# EAGLE board 2-28-13 x1_1 (EAGLE 6.3), part 1 of 2
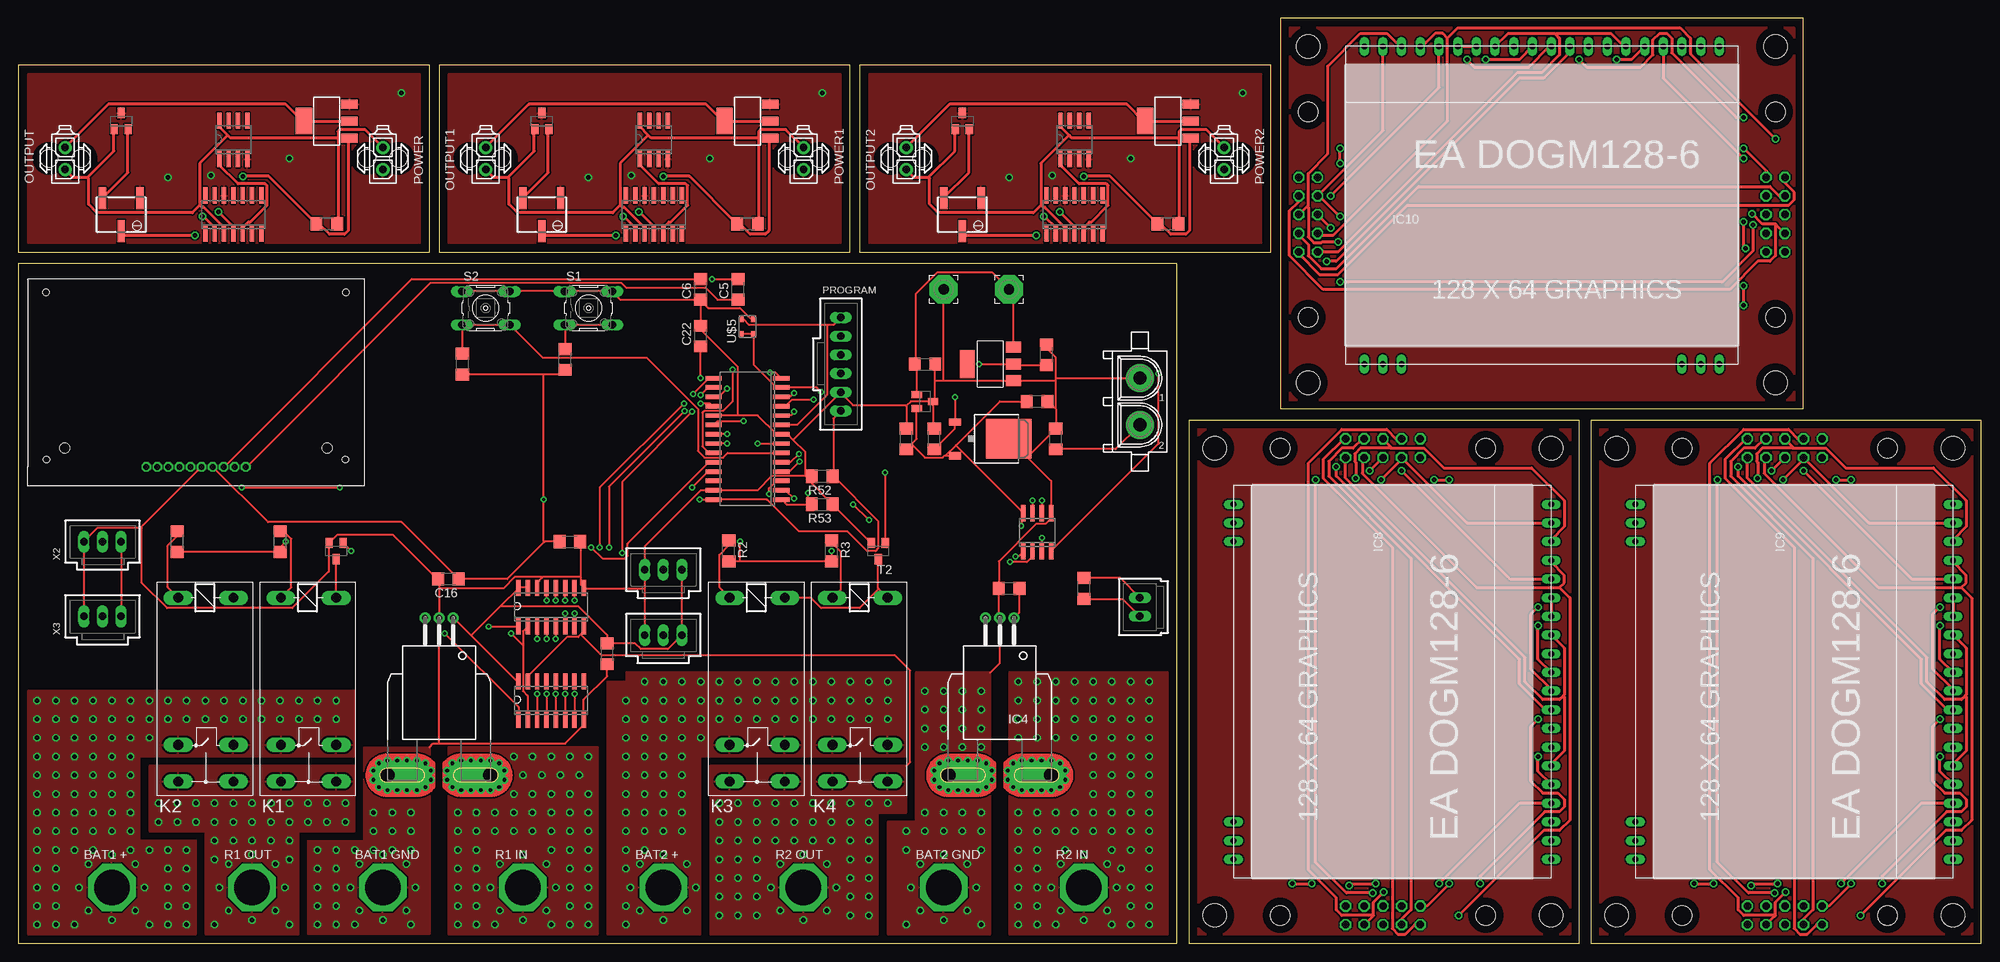
[diagram p0: board, top side]
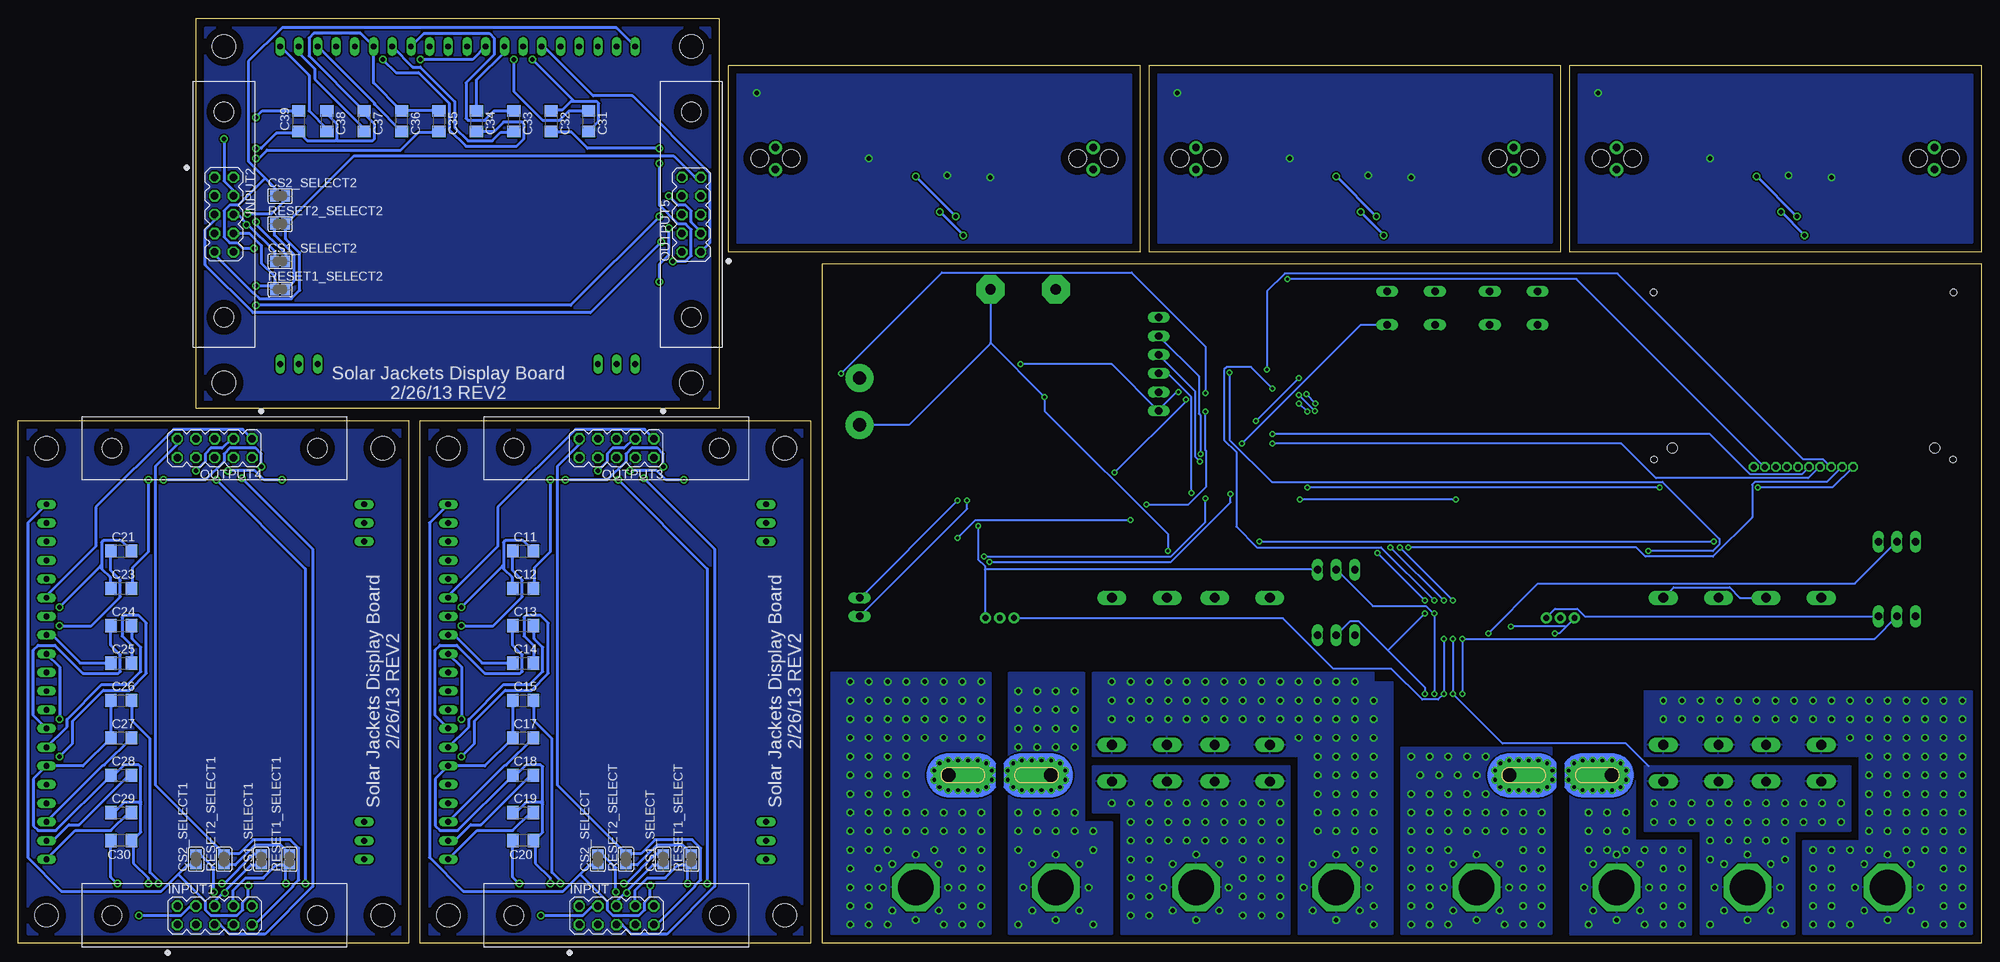
[diagram p1: board, bottom side, seen from below]

Size 266.7 x 125.73 mm. Coordinates in mm from the lower left corner, seen from the top.
Outline: 0,0 157.46,0 157.46,92.38 0,92.38 0,0
Outline: 0,93.98 55.88,93.98 55.88,119.38 0,119.38 0,93.98
Outline: 57.15,93.98 113.03,93.98 113.03,119.38 57.15,119.38 57.15,93.98
Outline: 114.3,93.98 170.18,93.98 170.18,119.38 114.3,119.38 114.3,93.98
Outline: 212.09,0 212.09,71.1 159.08,71.1 159.08,0 212.09,0
Outline: 266.7,0 266.7,71.1 213.69,71.1 213.69,0 266.7,0
Outline: 242.57,125.73 171.47,125.73 171.47,72.72 242.57,72.72 242.57,125.73
Copper layers (1*16): Top 0.035mm / dielectric 1.5mm / Bottom 0.035mm
Design rules "default": minimum track width 10mil, minimum drill 24mil, track to track 8mil, track to pad 8mil, pad to pad 8mil, via to via 8mil, smd to smd 8mil, copper to edge 40mil, drill to drill 8mil, minimum pad ring 10mil, minimum via ring 8mil, stop-mask expansion 4mil, vias tented up to drill 0mil, thermal gap 10mil
Holes 3.17 mm at 208.28,3.81 208.28,67.31 162.56,67.31 162.56,3.81 262.89,3.81 262.89,67.31 217.17,67.31 217.17,3.81 238.76,121.92 175.26,121.92 175.26,76.2 238.76,76.2
vRestrict: area 167.6,8.9 to 205.7,62.2; area 222.2,8.9 to 260.4,62.2; area 180.3,81.3 to 233.7,119.4

## Footprints (pad centres in the part's own frame; a part is rotated, then mirrored left to right if it is on the bottom)
SOLDERPAD = drill 4.826 pad 6.452 octagon: P$1 0,0
C1206 = smd 1.6 x 1.8: 1 -1.4,0; 2 1.4,0
SJ = smd 1.168 x 1.6: 1 -0.762,0; 2 0.762,0
TO252 = smd 1 x 1.6: 1 -2.28,-4.8; 2 2.28,-4.8 | smd 5.4 x 6.2: 3 0,2.5
CB-PFF = drill 0.8 pad 1.5: 1 -1.91,-21.4; 2 0,-21.4; 3 1.91,-21.4 | drill 2 pad 4 offset: IP+ 7,0; IP- -7,0 | drill 0.5 pad 0.9: IP+@2 8.89,0.635; IP+@3 8.89,-0.635; IP+@4 8.175,-1.625; IP+@5 7,-2; IP+@6 5.675,-2; IP+@7 4.35,-2; IP+@8 3,-2; IP+@9 1.825,-1.625; IP+@10 1.1,-0.625; IP+@11 1.1,0.625; IP+@12 1.825,1.625; IP+@13 3,2; IP+@14 4.35,2; IP+@15 5.675,2; IP+@16 7,2; IP+@17 8.175,1.625; IP-@2 -8.89,0.635; IP-@3 -8.89,-0.635; IP-@4 -8.175,-1.625; IP-@5 -7,-2; IP-@6 -5.675,-2; IP-@7 -4.325,-2; IP-@8 -3,-2; IP-@9 -1.825,-1.625; IP-@10 -1.1,-0.625; IP-@11 -1.1,0.625; IP-@12 -1.825,1.625; IP-@13 -3,2; IP-@14 -4.325,2; IP-@15 -5.675,2; IP-@16 -7,2; IP-@17 -8.175,1.625
SOT223 = smd 1.499 x 2.007: 1 -2.261,-3.15; 2 0.025,-3.15; 3 2.311,-3.15 | smd 3.81 x 2.007: 4 0,3.15
SO14 = smd 0.6 x 2.2: 1 -3.81,-2.6; 2 -2.54,-2.6; 3 -1.27,-2.6; 4 0,-2.6; 5 1.27,-2.6; 6 2.54,-2.6; 7 3.81,-2.6; 8 3.81,2.6; 9 2.54,2.6; 10 1.27,2.6; 11 0,2.6; 12 -1.27,2.6; 13 -2.54,2.6; 14 -3.81,2.6
EADOGM128 = drill 0.8 long: 1 -25.4,-21.59; 2 -22.86,-21.59; 3 -20.32,-21.59; 18 17.78,-21.59; 19 20.32,-21.59; 20 22.86,-21.59; 21 22.86,21.59; 22 20.32,21.59; 23 17.78,21.59; 24 15.24,21.59; 25 12.7,21.59; 26 10.16,21.59; 27 7.62,21.59; 28 5.08,21.59; 29 2.54,21.59; 30 0,21.59; 31 -2.54,21.59; 32 -5.08,21.59; 33 -7.62,21.59; 34 -10.16,21.59; 35 -12.7,21.59; 36 -15.24,21.59; 37 -17.78,21.59; 38 -20.32,21.59; 39 -22.86,21.59; 40 -25.4,21.59
MA05-2 = drill 1.016 octagon: 1 -5.08,-1.27; 2 -5.08,1.27; 3 -2.54,-1.27; 4 -2.54,1.27; 5 0,-1.27; 6 0,1.27; 7 2.54,-1.27; 8 2.54,1.27; 9 5.08,-1.27; 10 5.08,1.27 | hole 2.692: -13.97,0; 13.97,0
350428-1 = drill 1.8 pad 3.81: 1 -3.175,0; 2 3.175,0
G2REA = drill 1.321 long: 1 -2.54,-3.683; 2 -2.54,3.81; P 17.45,-3.683; P@ 17.45,3.81; S 22.454,-3.683; S@ 22.454,3.81
794681-2 = drill 1 pad 1.778: 1 0,-1.5; 2 0,1.5 | hole 2.4: 2.13,0; -2.17,0
3,81/1,4 = drill 1.397 pad 3.81 octagon: 1 0,0
70543-06 = drill 1.016 long: 1 -6.35,0; 2 -3.81,0; 3 -1.27,0; 4 1.27,0; 5 3.81,0; 6 6.35,0
R1206 = smd 1.6 x 1.803: 1 -1.422,0; 2 1.422,0
RTRIMTS63Y = smd 1 x 3: 1 -2.55,-2.25; 2 0,2.25; 3 2.55,-2.25
B3F-10XX = drill 1.016 long: 1 -3.251,2.261; 2 3.251,2.261; 3 -3.251,-2.261; 4 3.251,-2.261
SOT23 = smd 1 x 1.4: 1 -0.95,-1.1; 2 0.95,-1.1; 3 0,1.1
SO16 = smd 0.6 x 2.2: 1 -4.445,-2.6; 2 -3.175,-2.6; 3 -1.905,-2.6; 4 -0.635,-2.6; 5 0.635,-2.6; 6 1.905,-2.6; 7 3.175,-2.6; 8 4.445,-2.6; 9 4.445,2.6; 10 3.175,2.6; 11 1.905,2.6; 12 0.635,2.6; 13 -0.635,2.6; 14 -1.905,2.6; 15 -3.175,2.6; 16 -4.445,2.6
LCD_SCREEN = drill 0.8 octagon: 1 -6.75,0; 2 -5.25,0; 3 -3.75,0; 4 -2.25,0; 5 -0.75,0; 6 0.75,0; 7 2.25,0; 8 3.75,0; 9 5.25,0; 10 6.75,0 | hole 0.9: 20.3,1; -20.3,1; 20.4,23.7; -20.4,23.7 | hole 1.4: 17.85,2.55; -17.85,2.55
SO28W = smd 0.6 x 2.2: 1 -8.255,-4.6; 2 -6.985,-4.6; 3 -5.715,-4.6; 4 -4.445,-4.6; 5 -3.175,-4.6; 6 -1.905,-4.6; 7 -0.635,-4.6; 8 0.635,-4.6; 9 1.905,-4.6; 10 3.175,-4.6; 11 4.445,-4.6; 12 5.715,-4.6; 13 6.985,-4.6; 14 8.255,-4.6; 15 8.255,4.6; 16 6.985,4.6; 17 5.715,4.6; 18 4.445,4.6; 19 3.175,4.6; 20 1.905,4.6; 21 0.635,4.6; 22 -0.635,4.6; 23 -1.905,4.6; 24 -3.175,4.6; 25 -4.445,4.6; 26 -5.715,4.6; 27 -6.985,4.6; 28 -8.255,4.6
ASE = smd 0.9 x 0.65: 1 -1.05,-0.825; 2 1.05,-0.825; 3 1.05,0.825; 4 -1.05,0.825
SO-08 = smd 0.6 x 2.2: 1 -1.905,-2.6; 2 -0.635,-2.6; 3 0.635,-2.6; 4 1.905,-2.6; 5 1.905,2.6; 6 0.635,2.6; 7 -0.635,2.6; 8 -1.905,2.6
SOT223' = smd 1.219 x 2.235: 1 -2.311,-3.099; 2 0,-3.099; 3 2.311,-3.099 | smd 3.6 x 2.2: 4 0,3.099
70543-03 = drill 1.016 long: 1 -2.54,0; 2 0,0; 3 2.54,0
70543-02 = drill 1.016 long: 1 -1.27,0; 2 1.27,0

## Placement (x,y rotation side)
BAT+_1  BAT1 +  [SOLDERPAD]  12.7,7.62 0 top
BAT+_2  BAT2 +  [SOLDERPAD]  87.63,7.62 0 top
BAT-_1  BAT1 GND  [SOLDERPAD]  49.53,7.62 0 top
BAT-_2  BAT2 GND  [SOLDERPAD]  125.73,7.62 0 top
C1  .3uF  [C1206]  123.19,78.74 0 top
C2  1uF  [C1206]  124.46,68.58 90 top
C3  1uF  [C1206]  134.62,48.26 0 top
C4  1uF  [C1206]  120.65,68.58 90 top
C5  1uF  [C1206]  97.79,88.9 90 top
C6  1uF  [C1206]  92.71,88.9 90 top
C7  1uF  [C1206]  138.43,73.66 0 top
C8  1uF  [C1206]  140.97,68.58 90 top
C9  1uF  [C1206]  139.7,80.01 90 top
C10  1uF  [C1206]  80.01,39.37 90 top
C11  1uF  [C1206]  198.12,53.34 0 bottom
C12  1uF  [C1206]  198.12,48.26 0 bottom
C13  1uF  [C1206]  198.12,43.18 0 bottom
C14  1uF  [C1206]  198.12,38.1 0 bottom
C15  1uF  [C1206]  198.12,33.02 0 bottom
C16  .1uF  [C1206]  58.42,49.53 180 top
C17  1uF  [C1206]  198.12,27.94 0 bottom
C18  1uF  [C1206]  198.12,22.86 0 bottom
C19  1uF  [C1206]  198.12,17.78 0 bottom
C20  1uF  [C1206]  198.12,13.97 180 bottom
C21  1uF  [C1206]  252.73,53.34 0 bottom
C22  1uF  [C1206]  92.71,82.55 90 top
C23  1uF  [C1206]  252.73,48.26 0 bottom
C24  1uF  [C1206]  252.73,43.18 0 bottom
C25  1uF  [C1206]  252.73,38.1 0 bottom
C26  1uF  [C1206]  252.73,33.02 0 bottom
C27  1uF  [C1206]  252.73,27.94 0 bottom
C28  1uF  [C1206]  252.73,22.86 0 bottom
C29  1uF  [C1206]  252.73,17.78 0 bottom
C30  1uF  [C1206]  252.73,13.97 180 bottom
C31  1uF  [C1206]  189.23,111.76 270 bottom
C32  1uF  [C1206]  194.31,111.76 270 bottom
C33  1uF  [C1206]  199.39,111.76 270 bottom
C34  1uF  [C1206]  204.47,111.76 270 bottom
C35  1uF  [C1206]  209.55,111.76 270 bottom
C36  1uF  [C1206]  214.63,111.76 270 bottom
C37  1uF  [C1206]  219.71,111.76 270 bottom
C38  1uF  [C1206]  224.79,111.76 270 bottom
C39  1uF  [C1206]  228.6,111.76 90 bottom
C48  .1uF  [C1206]  74.93,54.61 0 top
CS1_SELECT  [SJ]  179.07,11.43 90 bottom
CS1_SELECT1  [SJ]  233.68,11.43 90 bottom
CS1_SELECT2  [SJ]  231.14,92.71 0 bottom
CS2_SELECT  [SJ]  187.96,11.43 90 bottom
CS2_SELECT1  [SJ]  242.57,11.43 90 bottom
CS2_SELECT2  [SJ]  231.14,101.6 0 bottom
IC1  7805DT  [TO252]  132.08,68.58 270 top
IC2  ACS758ECB-200B-PFF-T  [CB-PFF]  57.15,22.86 180 top
IC3  REG1117  [SOT223]  132.08,78.74 90 top
IC4  ACS758ECB-200B-PFF-T  [CB-PFF]  133.35,22.86 180 top
IC5  LM339D  [SO14]  29.21,99.06 0 top
IC6  LM339D  [SO14]  86.36,99.06 0 top
IC7  LM339D  [SO14]  143.51,99.06 0 top
IC8  EADOGM128  [EADOGM128]  186.69,34.29 270 top
IC9  EADOGM128  [EADOGM128]  241.3,34.29 270 top
IC10  EADOGM128  [EADOGM128]  208.28,100.33 0 top
INPUT  AMP_LATCH_10  [MA05-2]  185.42,3.81 0 bottom
INPUT1  AMP_LATCH_10  [MA05-2]  240.03,3.81 0 bottom
INPUT2  AMP_LATCH_10  [MA05-2]  238.76,99.06 270 bottom
J1  350428-1  [350428-1]  152.4,73.66 270 top
K1  G2REA  [G2REA]  39.37,44.45 270 top
K2  G2REA  [G2REA]  25.4,44.45 270 top
K3  G2REA  [G2REA]  100.33,44.45 270 top
K4  G2REA  [G2REA]  114.3,44.45 270 top
OUTPUT  794681-2  [794681-2]  6.35,106.68 0 top
OUTPUT1  794681-2  [794681-2]  63.5,106.68 0 top
OUTPUT2  794681-2  [794681-2]  120.65,106.68 0 top
OUTPUT3  AMP_LATCH_10  [MA05-2]  185.42,67.31 180 bottom
OUTPUT4  AMP_LATCH_10  [MA05-2]  240.03,67.31 180 bottom
OUTPUT5  AMP_LATCH_10  [MA05-2]  175.26,99.06 90 bottom
PAD_12V  12v  [3,81/1,4]  134.62,88.9 180 top
PAD_GND  gnd  [3,81/1,4]  125.73,88.9 180 top
POWER  794681-2  [794681-2]  49.53,106.68 0 top
POWER1  794681-2  [794681-2]  106.68,106.68 0 top
POWER2  794681-2  [794681-2]  163.83,106.68 0 top
PROGRAM  C-GRID-06-70543  [70543-06]  111.76,78.74 270 top
R1  1K  [R1206]  21.59,54.61 270 top
R2  1K  [R1206]  96.52,53.34 270 top
R3  1K  [R1206]  110.49,53.34 270 top
R4  1K  [R1206]  74.3,79.38 270 top
R5  1K  [R1206]  60.33,78.74 90 top
R6  120  [R1206]  144.78,48.26 270 top
R7  10k  [RTRIMTS63Y]  13.97,99.06 180 top
R8  10k  [RTRIMTS63Y]  71.12,99.06 180 top
R9  10k  [RTRIMTS63Y]  128.27,99.06 180 top
R52  10k\  [R1206]  109.22,63.5 180 top
R53  470  [R1206]  109.22,59.69 180 top
R169  1K  [R1206]  35.56,54.61 270 top
R_IN_1  R1 IN  [SOLDERPAD]  68.58,7.62 0 top
R_IN_2  R2 IN  [SOLDERPAD]  144.78,7.62 0 top
R_OUT_1  R1 OUT  [SOLDERPAD]  31.75,7.62 0 top
R_OUT_2  R2 OUT  [SOLDERPAD]  106.68,7.62 0 top
RESET1_SELECT  [SJ]  175.26,11.43 90 bottom
RESET1_SELECT1  [SJ]  229.87,11.43 90 bottom
RESET1_SELECT2  [SJ]  231.14,88.9 0 bottom
RESET2_SELECT  [SJ]  184.15,11.43 90 bottom
RESET2_SELECT1  [SJ]  238.76,11.43 90 bottom
RESET2_SELECT2  [SJ]  231.14,97.79 0 bottom
S1  [B3F-10XX]  77.47,86.36 0 top
S2  [B3F-10XX]  63.5,86.36 0 top
T1  PMV56XN  [SOT23]  43.18,53.34 180 top
T2  PMV56XN  [SOT23]  116.84,53.34 180 top
U$1  MCP-3008  [SO16]  72.39,45.72 0 top
U$2  LCD_SCREEN  [LCD_SCREEN]  24.13,64.77 0 top
U$3  SP720APP  [SO16]  72.39,33.02 0 top
U$4  PIC24HJ128GP-202  [SO28W]  99.06,68.58 90 top
U$5  ASE  [ASE]  99.06,83.82 90 top
U$6  MAX6105  [SOT23]  123.19,73.66 270 top
U$7  MAX3440E  [SO-08]  138.43,55.88 0 top
U$8  100  [R1206]  41.91,97.79 0 top
U$9  MAX6103  [SOT23]  13.97,111.76 0 top
U$10  NDT3055  [SOT223']  41.91,111.76 90 top
U$11  LM35  [SO-08]  29.21,109.22 0 top
U$12  100  [R1206]  99.06,97.79 0 top
U$13  MAX6103  [SOT23]  71.12,111.76 0 top
U$14  NDT3055  [SOT223']  99.06,111.76 90 top
U$15  LM35  [SO-08]  86.36,109.22 0 top
U$16  100  [R1206]  156.21,97.79 0 top
U$17  MAX6103  [SOT23]  128.27,111.76 0 top
U$18  NDT3055  [SOT223']  156.21,111.76 90 top
U$19  LM35  [SO-08]  143.51,109.22 0 top
X1  BAT2 TEMP 1  [70543-03]  87.63,50.8 0 top
X2  BAT1 TEMP1  [70543-03]  11.43,54.61 0 top
X3  BAT1 TEMP2  [70543-03]  11.43,44.45 0 top
X4  BAT2 TEMP2  [70543-03]  87.63,41.91 0 top
X5  rs-485  [70543-02]  152.4,45.72 90 top

## Library data of the parts
BAT+_1 BAT+_2 BAT-_1 BAT-_2 R_IN_1 R_IN_2 R_OUT_1 R_OUT_2 U$1 U$3 U$6 = SolarJackets_Common
C1-C39 C48 R1-R6 R52 R53 R169 = rcl
CS1_SELECT CS1_SELECT1 CS1_SELECT2 CS2_SELECT CS2_SELECT1 CS2_SELECT2 RESET1_SELECT RESET1_SELECT1 RESET1_SELECT2 RESET2_SELECT RESET2_SELECT1 RESET2_SELECT2 = jumper
IC1 IC5-IC7 = linear
IC2 IC4 = allegro; MPN: ACS758ECB-200B-PFF-T; OC_FARNELL: 1718993; OC_NEWARK: 04R7127
IC3 = burr-brown; MPN: REG1117; OC_FARNELL: 1097566; OC_NEWARK: 14P6981
IC8-IC10 = ea-dogm
INPUT INPUT1 INPUT2 OUTPUT3-OUTPUT5 = SolarJackets_Common; PART_NUM: 5499922-1
J1 OUTPUT OUTPUT1 OUTPUT2 POWER POWER1 POWER2 = con-amp
K1-K4 = relay; OC_FARNELL: unknown; OC_NEWARK: unknown
PAD_12V PAD_GND = wirepad
PROGRAM X1-X5 = con-molex; OC_FARNELL: unknown; OC_NEWARK: unknown
R7-R9 = resistor
S1 S2 = switch-omron; MPN: B3F-1000; OC_FARNELL: 176432; OC_NEWARK: 36M3542
T1 T2 = SolarJacketsADC; PART_NUM: PMV56XN,215
U$2 = LCD_SCREEN
U$4 = LTC6803
U$5 = crystal; OC_FARNELL: unknown; OC_NEWARK: unknown
U$7 = SolarJackets
U$8 U$9 U$11-U$13 U$15-U$17 U$19 = SolarJacketsADC
U$10 U$14 U$18 = SolarJacketsADC; PART_NUM: NDT3055

## Nets
3.3V: IC8.34 IC8.35 INPUT.1 OUTPUT3.1
3.3V1: IC9.34 IC9.35 INPUT1.1 OUTPUT4.1
3.3V2: IC10.34 IC10.35 INPUT2.1 OUTPUT5.1
12V: IC5.3 OUTPUT.1 POWER.2 U$8.2 U$9.1 U$11.8
12V1: IC6.3 OUTPUT1.1 POWER1.2 U$12.2 U$13.1 U$15.8
12V2: IC7.3 OUTPUT2.1 POWER2.2 U$16.2 U$17.1 U$19.8
+3V3: C9.1 C16.1 C48.1 IC3.2 PROGRAM.6 R4.2 R5.1 R52.1 U$2.7 U$4.13 U$4.28 U$5.1 U$5.4
+5V: C3.2 C4.1 C7.1 C10.2 IC1.2 IC2.1 IC4.1 U$1.15 U$1.16 U$3.16 U$6.2 U$7.8 X1.3 X2.3 X3.3 X4.3
+12V: C1.1 C2.1 C8.1 IC1.1 IC3.3 J1.2 PAD_12V.1 R1.2 R2.2 R3.2 R169.2 U$6.1
A0: IC8.38 INPUT.5 OUTPUT3.5
A1: IC9.38 INPUT1.5 OUTPUT4.5
A2: IC10.38 INPUT2.5 OUTPUT5.5
CH0: IC2.3 U$1.1 U$3.1
CH1: U$1.2 U$3.2 X2.2
CH2: U$1.3 U$3.3 X3.2
CH3: K1.S K1.S@ K2.S K2.S@ R_OUT_1.P$1 U$1.4 U$3.4
CH4: IC4.3 U$1.5 U$3.5
CH5: U$1.6 U$3.6 X1.2
CH6: U$1.7 U$3.7 X4.2
CH7: K3.S K3.S@ K4.S K4.S@ R_OUT_2.P$1 U$1.8 U$3.15
CS1: CS1_SELECT.1 INPUT.6 OUTPUT3.6
CS2: CS2_SELECT.2 INPUT.7 OUTPUT3.7
CS3: CS1_SELECT1.1 INPUT1.6 OUTPUT4.6
CS4: CS2_SELECT1.2 INPUT1.7 OUTPUT4.7
CS5: CS1_SELECT2.1 INPUT2.6 OUTPUT5.6
CS6: CS2_SELECT2.2 INPUT2.7 OUTPUT5.7
CS_SLCT: CS1_SELECT.2 CS2_SELECT.1 IC8.40
CS_SLCT1: CS1_SELECT1.2 CS2_SELECT1.1 IC9.40
CS_SLCT2: CS1_SELECT2.2 CS2_SELECT2.1 IC10.40
GND: BAT-_1.P$1 BAT-_2.P$1 C1.2 C2.2 C3.1 C4.2 C6.1 C7.2 C8.2 C9.2 C10.1 C16.2 C22.2 C48.2 IC1.3 IC2.2 IC2.IP+ IC2.IP+@2 IC2.IP+@3 IC2.IP+@4 IC2.IP+@5 IC2.IP+@6 IC2.IP+@7 IC2.IP+@8 IC2.IP+@9 IC2.IP+@10 IC2.IP+@11 IC2.IP+@12 IC2.IP+@13 IC2.IP+@14 IC2.IP+@15 IC2.IP+@16 IC2.IP+@17 IC3.1 IC4.2 IC4.IP+ IC4.IP+@2 IC4.IP+@3 IC4.IP+@4 IC4.IP+@5 IC4.IP+@6 IC4.IP+@7 IC4.IP+@8 IC4.IP+@9 IC4.IP+@10 IC4.IP+@11 IC4.IP+@12 IC4.IP+@13 IC4.IP+@14 IC4.IP+@15 IC4.IP+@16 IC4.IP+@17 J1.1 PAD_GND.1 PROGRAM.5 R52.2 R53.1 S1.1 S1.2 S2.1 S2.2 T1.2 T2.2 U$1.9 U$1.14 U$2.6 U$3.8 U$4.8 U$4.19 U$4.27 U$5.2 U$6.3 U$7.5 X1.1 X2.1 X3.1 X4.1
GND1: IC5.12 POWER.1 R7.1 U$9.3 U$10.3 U$11.4
GND2: IC6.12 POWER1.1 R8.1 U$13.3 U$14.3 U$15.4
GND3: IC7.12 POWER2.1 R9.1 U$17.3 U$18.3 U$19.4
GND4: C14.1 C15.1 C17.1 C18.1 C19.1 C20.1 IC8.26 IC8.33 INPUT.2 OUTPUT3.2
GND5: C25.1 C26.1 C27.1 C28.1 C29.1 C30.1 IC9.26 IC9.33 INPUT1.2 OUTPUT4.2
GND6: C34.1 C35.1 C36.1 C37.1 C38.1 C39.1 IC10.26 IC10.33 INPUT2.2 OUTPUT5.2
MCLR: PROGRAM.4 R53.2 U$4.1
N$1: K1.2 K2.2 T1.3
N$2: K2.1 R1.1
N$3: BAT+_2.P$1 K3.P K3.P@ K4.P K4.P@
N$4: K3.1 R2.1
N$5: K3.2 K4.2 T2.3
N$6: K4.1 R3.1
N$7: IC4.IP- IC4.IP-@2 IC4.IP-@3 IC4.IP-@4 IC4.IP-@5 IC4.IP-@6 IC4.IP-@7 IC4.IP-@8 IC4.IP-@9 IC4.IP-@10 IC4.IP-@11 IC4.IP-@12 IC4.IP-@13 IC4.IP-@14 IC4.IP-@15 IC4.IP-@16 IC4.IP-@17 R_IN_2.P$1
N$13: IC2.IP- IC2.IP-@2 IC2.IP-@3 IC2.IP-@4 IC2.IP-@5 IC2.IP-@6 IC2.IP-@7 IC2.IP-@8 IC2.IP-@9 IC2.IP-@10 IC2.IP-@11 IC2.IP-@12 IC2.IP-@13 IC2.IP-@14 IC2.IP-@15 IC2.IP-@16 IC2.IP-@17 R_IN_1.P$1
N$20: C6.2 U$2.8
N$21: C5.2 U$2.9
N$22: C5.1 U$2.10
N$45: IC5.2 U$8.1 U$10.1
N$48: C22.1 U$4.20
N$57: IC5.4 R7.2
N$65: R7.3 U$9.2
N$73: OUTPUT.2 U$10.2 U$10.4
N$74: IC5.5 U$11.1
N$86: IC6.2 U$12.1 U$14.1
N$100: IC6.4 R8.2
N$101: R8.3 U$13.2
N$104: OUTPUT1.2 U$14.2 U$14.4
N$107: IC6.5 U$15.1
N$109: IC7.2 U$16.1 U$18.1
N$110: IC7.4 R9.2
N$114: R9.3 U$17.2
N$115: OUTPUT2.2 U$18.2 U$18.4
N$116: IC7.5 U$19.1
N$117: C11.2 C12.1 IC8.30
N$118: C11.1 IC8.31
N$120: C12.2 IC8.29
N$121: C13.2 IC8.27
N$122: C13.1 IC8.28
N$124: C14.2 IC8.25
N$126: C15.2 IC8.24
N$127: C17.2 IC8.23
N$130: C18.2 IC8.22
N$131: C19.2 IC8.21
N$157: C20.2 IC8.32
N$158: C21.2 C23.1 IC9.30
N$159: C21.1 IC9.31
N$160: C23.2 IC9.29
N$161: C24.2 IC9.27
N$162: C24.1 IC9.28
N$163: C25.2 IC9.25
N$164: C26.2 IC9.24
N$165: C27.2 IC9.23
N$166: C28.2 IC9.22
N$167: C29.2 IC9.21
N$168: C30.2 IC9.32
N$169: C31.2 C32.1 IC10.30
N$170: C31.1 IC10.31
N$171: C32.2 IC10.29
N$172: K1.1 R169.1
N$173: C33.2 IC10.27
N$174: C33.1 IC10.28
N$175: C34.2 IC10.25
N$176: C35.2 IC10.24
N$177: C36.2 IC10.23
N$178: C37.2 IC10.22
N$182: C38.2 IC10.21
N$183: C39.2 IC10.32
N$219: R6.2 U$7.7 X5.1
N$220: R6.1 U$7.6 X5.2
N$278: BAT+_1.P$1 K1.P K1.P@ K2.P K2.P@
OSC1: PROGRAM.1 U$4.9 U$5.3
PGEC1: PROGRAM.2 U$4.5
PGED1: PROGRAM.3 U$4.4
RA0: U$4.2 U$7.1
RA1: U$4.3 U$7.2
RA3: U$4.10 U$7.3
RA4: U$4.12 U$7.4
RB2: R5.2 S2.3 S2.4 U$4.6
RB3: R4.1 S1.3 S1.4 U$4.7
RB4: T2.1 U$4.11
RB5: T1.1 U$4.14
RB6: U$1.13 U$4.15
RB7: U$1.12 U$4.16
RB8: U$1.11 U$4.17
RB9: U$1.10 U$4.18
RB10: U$2.5 U$4.21
RB11: U$2.4 U$4.22
RB12: U$2.3 U$4.23
RB13: U$2.2 U$4.24
RB14: U$2.1 U$4.25
RB15: U$4.26
RESET1: IC8.39 INPUT.8 OUTPUT3.8 RESET1_SELECT.1
RESET2: INPUT.9 OUTPUT3.9 RESET2_SELECT.2
RESET3: IC9.39 INPUT1.8 OUTPUT4.8 RESET1_SELECT1.1
RESET4: INPUT1.9 OUTPUT4.9 RESET2_SELECT1.2
RESET5: IC10.39 INPUT2.8 OUTPUT5.8 RESET1_SELECT2.1
RESET6: INPUT2.9 OUTPUT5.9 RESET2_SELECT2.2
RESET_SLCT: RESET1_SELECT.2 RESET2_SELECT.1
RESET_SLCT1: RESET1_SELECT1.2 RESET2_SELECT1.1
RESET_SLCT2: RESET1_SELECT2.2 RESET2_SELECT2.1
SCL: IC8.37 INPUT.4 OUTPUT3.4
SCL1: IC9.37 INPUT1.4 OUTPUT4.4
SCL2: IC10.37 INPUT2.4 OUTPUT5.4
SI: IC8.36 INPUT.3 OUTPUT3.3
SI1: IC9.36 INPUT1.3 OUTPUT4.3
SI2: IC10.36 INPUT2.3 OUTPUT5.3